# Altium PCB core.PcbDoc
Units mm, origin at the board's own origin, x right, y up, seen from the top; angles counter-clockwise.
Board outline 39.14 x 38.93 mm, 2 copper layers (Top Layer, Bottom Layer); 55 components, 63 nets, 243 pads, 505 vias.
Unrouted connection lines stored in the file: 1.
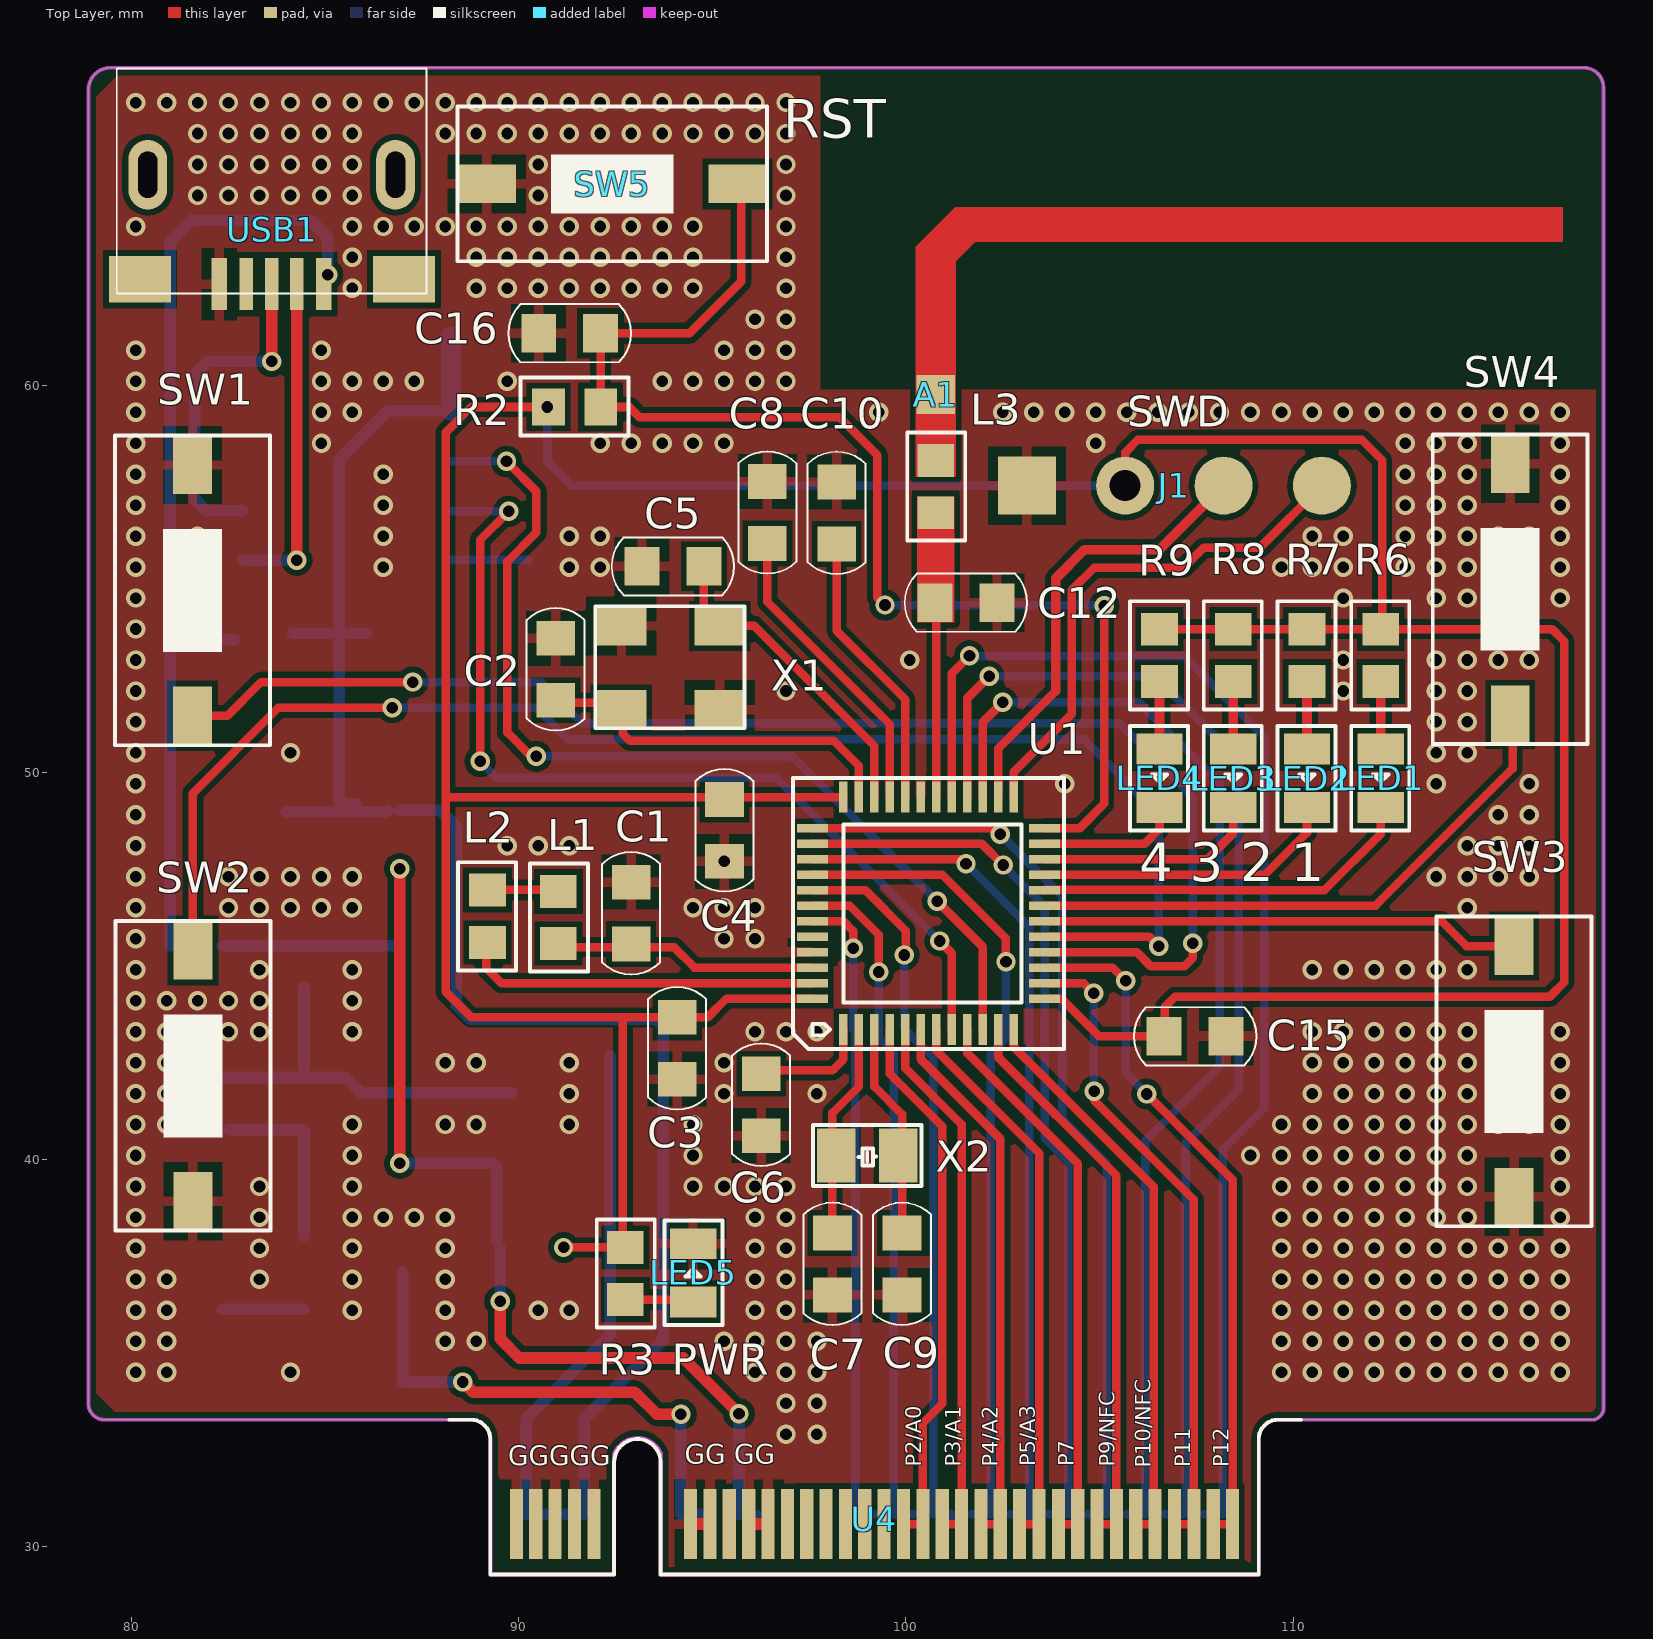
[diagram p0: Top Layer view]
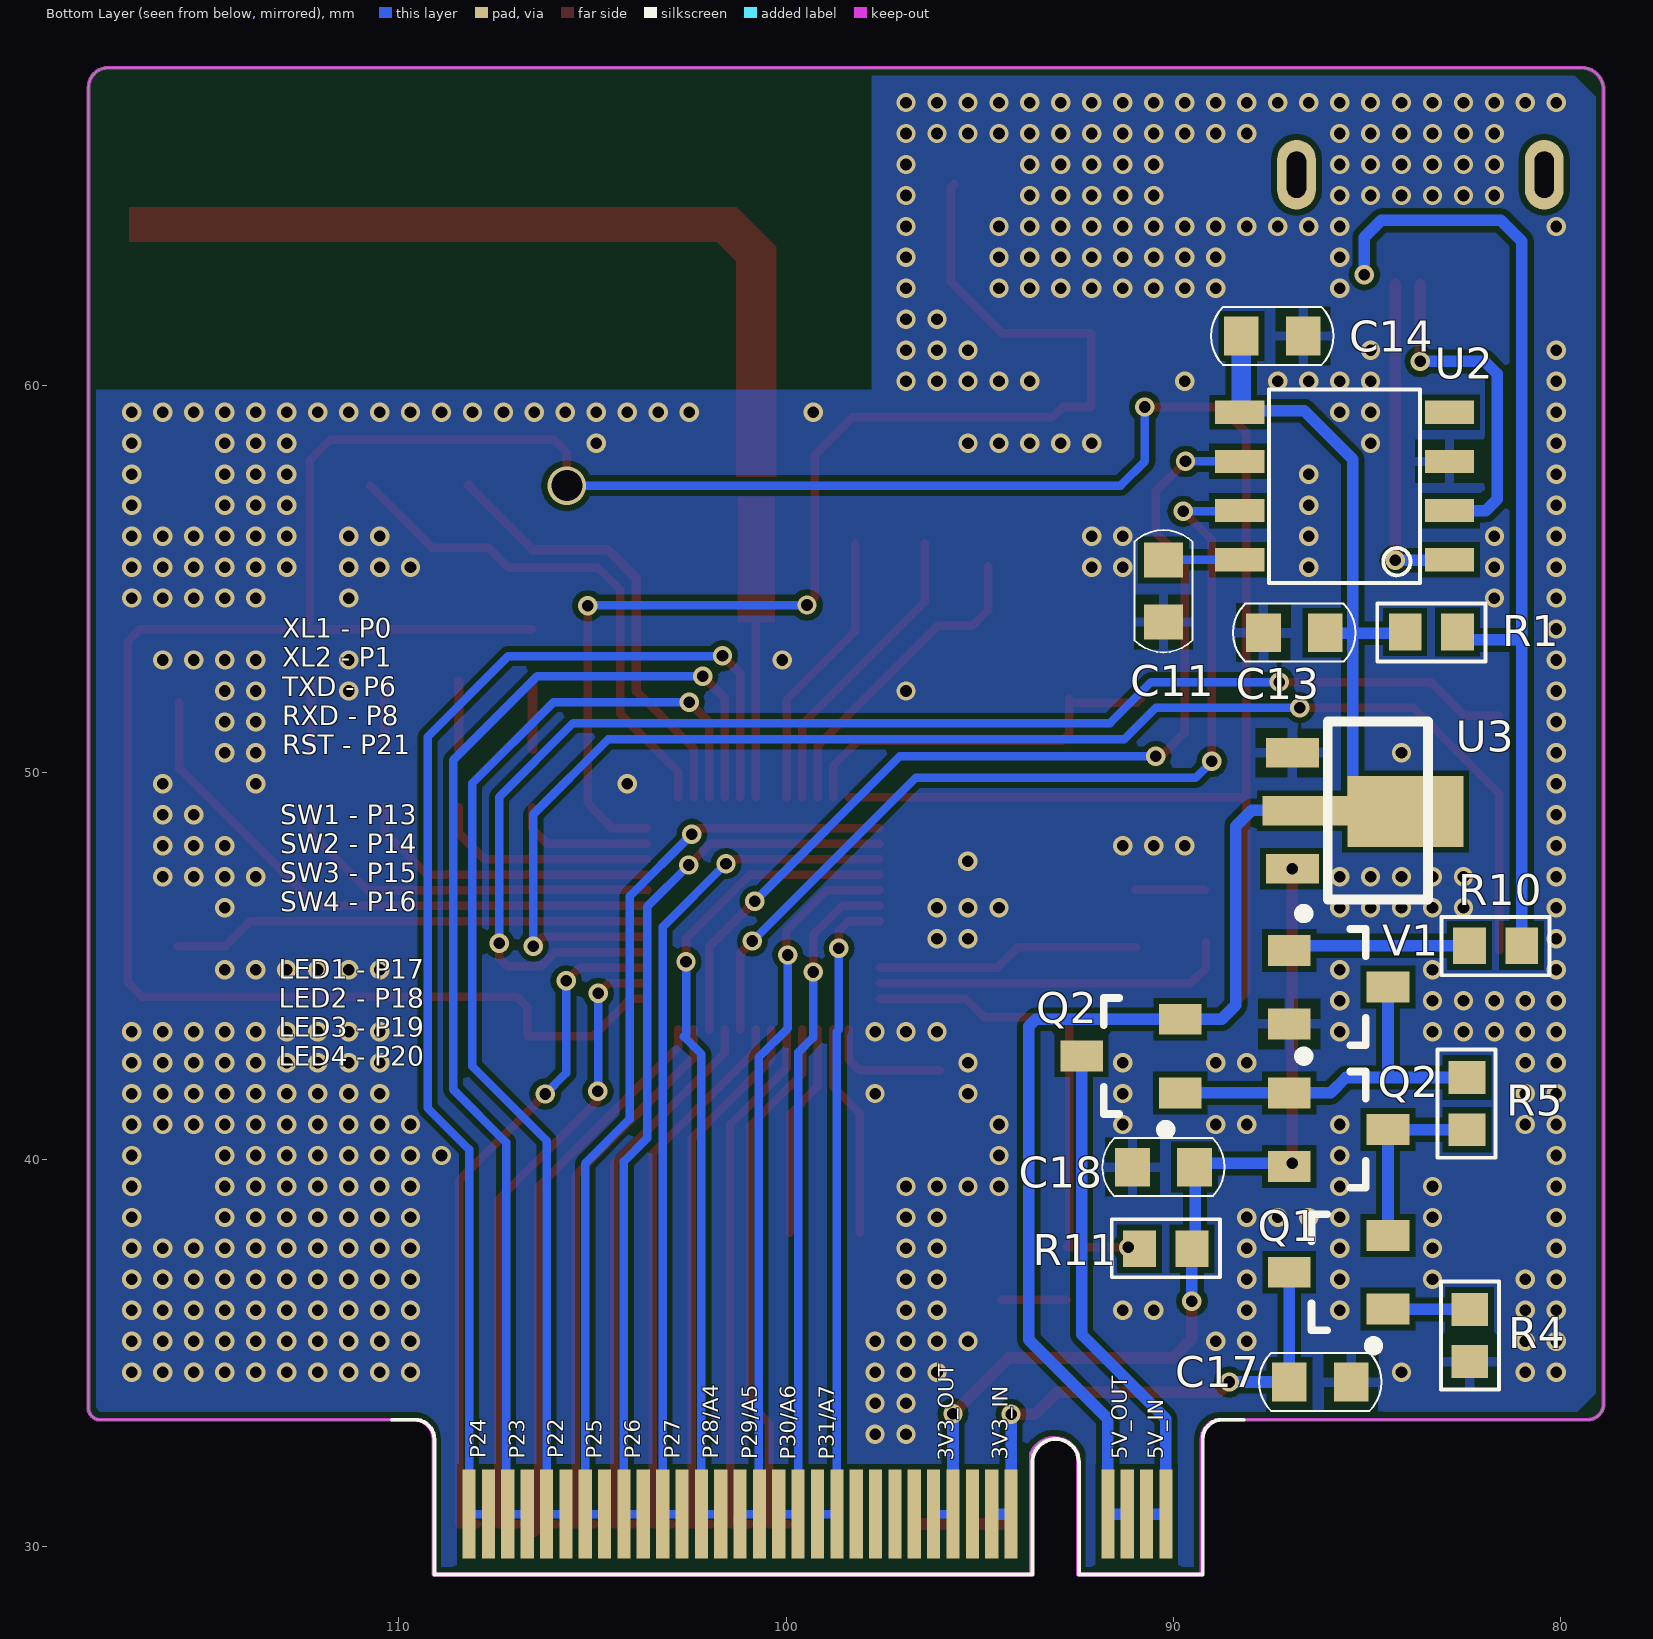
[diagram p1: Bottom Layer view, seen from below]

## Layer stack, top to bottom
Top Solder: solder mask 0.0102, Solder Resist, Dk 3.5
Top Layer: signal copper 0.0356
Dielectric 1: dielectric 0.32, FR-4, Dk 4.8
Bottom Layer: signal copper 0.0356
Bottom Solder: solder mask 0.0102, Solder Resist, Dk 3.5

## Board outline
89.263,29.274 89.263,32.774 ccw(c88.762,32.774) 88.762,33.274 79.296,33.274 cw(c79.296,33.69) 78.88,33.69 78.88,67.63 cw(c79.449,67.63) 79.449,68.199 117.511,68.199 cw(c117.511,67.69) 118.02,67.69 118.02,33.62 cw(c117.712,33.582) 117.75,33.274 109.612,33.274 ccw(c109.612,32.774) 109.112,32.774 109.112,29.275 109.113,29.274 93.67,29.274 93.67,32.41 ccw(c93.068,32.154) 92.456,32.386 92.456,29.278 92.451,29.274

## Design rules (kind name [scope] priority, off if disabled: settings)
Clearance [All] p1: gap=0.15
PlaneConnect [All] p1: planeconnectstyle=Direct reliefexpansion=0.508 reliefentries=4 reliefconductorwidth=0.254 reliefairgap=0.254
PolygonConnect PolygonConnect_1 [All vs IsVia] p1: connectstyle=Direct reliefconductorwidth=0.254 reliefentries=4 polygonreliefangle="90 Angle" airgapwidth=0.254
PolygonConnect [All] p2: connectstyle=Relief reliefconductorwidth=0.254 reliefentries=4 polygonreliefangle="90 Angle" airgapwidth=0.254
RoutingVias [All] p1: holewidth=0.711 width=1.27 viastyle="Through Hole" minholewidth=0.711 minwidth=1.27 maxholewidth=0.711 maxwidth=1.27
SolderMaskExpansion [All] p1: expansion=0.102
Width [All] p1: maxlimit=3 minlimit=0.2 preferedwidth=0.3
29 further rules are at their usual default settings.

## Components (designator, comment, footprint, x,y, rotation, side; value= is the part's Value field where it differs from the comment)
A1 "ANTENNA" AN2 100.769,59.757 r90 top
C1 "1uF" cap0603(1608) 92.9,46.36 r90 top
C2 "12pF" cap0603(1608) 90.951,52.66 r90 top
C3 "4.7uF" cap0603(1608) 94.09,42.87 r270 top
C4 "0.1uF" cap0603(1608) 95.31,48.5 r270 top
C5 "12pF" cap0603(1608) 93.98,55.32 r180 top
C6 "0.1uF" cap0603(1608) 96.26,41.411 r270 top
C7 "12pF" cap0603(1608) 98.1,37.3 r90 top
C8 "0.1uF" cap0603(1608) 96.42,56.71 r90 top
C9 "12pF" cap0603(1608) 99.9,37.3 r90 top
C10 "NC" cap0603(1608) 98.21,56.7 r90 top
C11 "0.1uF" cap0603(1608) 90.25,54.68 r270 bottom
C12 "0.8pF" cap0603(1608) 101.55,54.38 r0 top
C13 "10uF" cap0603(1608) 86.87,53.606 r0 bottom
C14 "0.47uF" cap0603(1608) 87.44,61.27 r180 bottom
C15 "0.1uF" cap0603(1608) 107.47,43.18 r0 top
C16 "1uF" cap0603(1608) 91.313,61.341 r180 top
C17 "1uF" cap0603(1608) 86.2,34.25 r180 bottom
C18 "10uF" cap0603(1608) 90.25,39.8 r0 bottom
J1 "SWD" HEAD-1x4-2.54-SMD 103.124,57.404 r0 top
L1 "15nH" 0603 91.02,46.25 r90 top
L2 "10uH" 0603 89.19,46.28 r270 top
L3 "3.9nH" 0603 100.77,57.38 r90 top
LED1 "LED" LED-0603-SMD 112.265,49.845 r270 top
LED2 "LED" LED-0603-SMD 110.36,49.845 r270 top
LED3 "LED" LED-0603-SMD 108.455,49.845 r270 top
LED4 "LED" LED-0603-SMD 106.55,49.845 r270 top
LED5 "PWR" LED-0603-SMD 94.5,37.07 r90 top
Q1 "AO3415" SOT-23-mosfet 85.725,37.084 r90 bottom
Q2 "AO3400" SOT-23-mosfet 91.09,42.67 r90 bottom
Q2 "AO3400" SOT-23-mosfet 85.725,40.767 r270 bottom
R1 "10" 0603 83.33,53.626 r180 bottom
R2 "47K" 0603 91.44,59.436 r180 top
R3 "3.3K" 0603 92.75,37.05 r90 top
R4 "47K" 0603 82.34,35.45 r90 bottom
R5 "47K" 0603 82.41,41.44 r270 bottom
R6 "220" 0603 112.265,53.02 r270 top
R7 "220" 0603 110.36,53.02 r270 top
R8 "220" 0603 108.455,53.02 r270 top
R9 "220" 0603 106.55,53.02 r270 top
R10 "47K" 0603 81.67,45.52 r180 bottom
R11 "0" 0603 90.19,37.69 r0 bottom
SW1 "SW-2P" SW_2PIN_3x6 81.57,57.937 r270 top
SW2 "SW-2P" SW_2PIN_3x6 81.58,38.92 r90 top
SW3 "SW-2P" SW_2PIN_3x6 115.71,39.033 r90 top
SW4 "SW-2P" SW_2PIN_3x6 115.61,57.967 r270 top
SW5 "RST" SW_2PIN_3x6 95.65,65.2 r180 top
U1 "N52832" N52832-QFN48 100.584,46.355 r90 top locked
U2 "CH340N" CH340N 87.52,54.89 r270 bottom
U3 "HT7333" HT7333-SOT-89 86.92,50.507 r270 bottom
U4 "M.2_MKEY_GF" M.2_M_KEY_GF 99.187,33.274 r0 top locked
USB1 "32010-05002-1220" "MICRO USB" 84.963,62.611 r0 top
V1 "NPN" SOT-23-NPN 85.725,44.45 r270 bottom
X1 "32MHz" X3225-4PIN 95.19,53.78 r180 top
X2 "32.768KHz" 32.768_A 99,40.1 r180 top

## Footprints (in the part's own frame and the unit in brackets; to place one, negate y for a bottom-side part, rotate by r counter-clockwise, add the part's x,y. Pads: shape width x height; smd on the part's side, far side on the other; paste and mask are expansions set on the pad)
32.768_A [mm]
  rect 1x1.4 smd mask+0.05: 1(-0.8,0) 2(0.8,0)
  silkscreen extent -1.4,-0.79 1.4,0.79, body extent -1.1,-0.67 1.1,0.68, height 0.7
0603 [mm]
  rect 0.85x0.95 smd: 1(-0.675,0) 2(0.675,0)
  silkscreen extent -1.4,-0.76 1.4,0.74, body extent -0.85,-0.45 0.85,0.45, height 0.89
AN2 [mm]
  rect 1x1 smd: 1(0,0)
  Top Layer region: -0.534,0.523 -0.534,-0.523 3.819,-0.523 3.819,0.523
  Top Layer region: 3.937,-16.202 4.842,-16.202 4.842,-0.501 3.937,-0.501
  Top Layer region: 3.109,-0.188 4.132,-1.211 4.842,-0.501 3.819,0.522
cap0603(1608) [mm] "Chip capcitance, Body 1.6x0.8mm, IPC Medium Density"
  rect 0.9x1 smd: 1(-0.8,0) 2(0.8,0)
  silkscreen extent -1.58,-0.75 1.58,0.75, body extent -0.85,-0.47 0.85,0.47, height 0.6
CH340N [mm]
  rect 0.6x1.27 smd: 1(-0.6,4.66) 2(-1.87,4.66) 3(-3.14,4.66) 4(-4.41,4.66) 5(-4.41,-0.76) 6(-3.14,-0.76) 7(-1.87,-0.76) 8(-0.6,-0.76)
  silkscreen extent -5,0 0,3.9
HEAD-1x4-2.54-SMD [mm]
  rect 1.5x1.5 smd: 1(0,0)
  round 1.5 smd: 2(2.54,0) 3(5.08,0) 4(7.62,0)
HT7333-SOT-89 [mil]
  rect 30x54 smd: 1(0,0) 3(118,0)
  rect 30x86.61 smd: 2(59,12.76)
  rect 72x118.11 smd: 2(60,115)
  silkscreen extent -31,36 150,138
LED-0603-SMD [mm]
  rect 0.8x1.2 smd: 1(-0.75,0) 2(0.75,0)
  silkscreen extent -1.35,-0.76 1.35,0.74, body extent -0.85,-0.45 0.85,0.45, height 0.89
M.2_M_KEY_GF [mm]
  rect 0.34x1.8 smd: 1(9.25,-2.694) 3(8.75,-2.694) 5(8.25,-2.694) 7(7.75,-2.694) 9(7.25,-2.694) 11(6.75,-2.694) 13(6.25,-2.694) 15(5.75,-2.694) 17(5.25,-2.694) 19(4.75,-2.694) 21(4.25,-2.694) 23(3.75,-2.694) 25(3.25,-2.694) 27(2.75,-2.694) 29(2.25,-2.694) 31(1.75,-2.694) 33(1.25,-2.694) 35(0.75,-2.694) 37(0.25,-2.694) 39(-0.25,-2.694) 41(-0.75,-2.694) 43(-1.25,-2.694) 45(-1.75,-2.694) 47(-2.25,-2.694) 49(-2.75,-2.694) 51(-3.25,-2.694) 53(-3.75,-2.694) 55(-4.25,-2.694) 57(-4.75,-2.694) 67(-7.25,-2.694) 69(-7.75,-2.694) 71(-8.25,-2.694) 73(-8.75,-2.694) 75(-9.25,-2.694)
  rect 0.34x2.3 smd far side: 2(9,-2.44) 4(8.5,-2.44) 6(8,-2.44) 8(7.5,-2.44) 10(7,-2.44) 12(6.5,-2.44) 14(6,-2.44) 16(5.5,-2.44) 18(5,-2.44) 20(4.5,-2.44) 22(4,-2.44) 24(3.5,-2.44) 26(3,-2.44) 28(2.5,-2.44) 30(2,-2.44) 32(1.5,-2.44) 34(1,-2.44) 36(0.5,-2.44) 38(0,-2.44) 40(-0.5,-2.44) 42(-1,-2.44) 44(-1.5,-2.44) 46(-2,-2.44) 48(-2.5,-2.44) 50(-3,-2.44) 52(-3.5,-2.44) 54(-4,-2.44) 56(-4.5,-2.44) 58(-5,-2.44) 68(-7.5,-2.44) 70(-8,-2.44) 72(-8.5,-2.44) 74(-9,-2.44)
  silkscreen extent -10.98,-4 11.02,0
"MICRO USB" [mm]
  rect 0.4x1.35 smd: 1(0,0) 5(-2.7,0)
  rect 0.35x1.35 smd: 2(-0.7,0) 3(-1.35,0) 4(-2,0)
  oval 1x1.8 hole 0.5 slot 1.2 at 90 deg: 6(1.85,2.827) 7(-4.55,2.827)
  rect 1.6x1.2 smd: 6(2.07,0.127) 7(-4.749,0.127)
  silkscreen extent -5.35,-0.25 2.65,5.56, body extent 1.4,20.01 1.4,20.01
N52832-QFN48 [mm]
  rect 0.8x0.22 smd: 1(-3,2.2) 2(-3,1.8) 3(-3,1.4) 4(-3,1) 5(-3,0.6) 6(-3,0.2) 7(-3,-0.2) 8(-3,-0.6) 9(-3,-1) 10(-3,-1.4) 11(-3,-1.8) 12(-3,-2.2) 25(3,-2.2) 26(3,-1.8) 27(3,-1.4) 28(3,-1) 29(3,-0.6) 30(3,-0.2) 31(3,0.2) 32(3,0.6) 33(3,1) 34(3,1.4) 35(3,1.8) 36(3,2.2)
  rect 0.22x0.8 smd: 13(-2.2,-3) 14(-1.8,-3) 15(-1.4,-3) 16(-1,-3) 17(-0.6,-3) 18(-0.2,-3) 19(0.2,-3) 20(0.6,-3) 21(1,-3) 22(1.4,-3) 23(1.8,-3) 24(2.2,-3) 37(2.2,3) 38(1.8,3) 39(1.4,3) 40(1,3) 41(0.6,3) 42(0.2,3) 43(-0.2,3) 44(-0.6,3) 45(-1,3) 46(-1.4,3) 47(-1.8,3) 48(-2.2,3)
  silkscreen extent -3.5,-3.5 3.5,3.5
SOT-23-mosfet [mm] "SOT-23, 3-Leads, Body 3,0x2,6mm (max), Pitch 0,95mm, IPC Medium Density"
  rect 0.8x1.1 smd: D(0,1.275) G(-0.95,-1.275) S(0.95,-1.275)
  silkscreen extent -2.03,-1.02 1.5,0.7, body extent -1.45,-1.21 1.45,1.21, height 0.98
SOT-23-NPN [mm]
  rect 0.8x1.1 smd: B(-0.95,-1.275) C(0,1.275) E(0.95,-1.275)
  silkscreen extent -2.03,-1.03 1.5,0.7, body extent -1.45,-1.21 1.45,1.21, height 0.98
SW_2PIN_3x6 [mm]
  rect 1.5x1 smd: 1(0,0) 2(6.477,0)
  silkscreen extent -0.76,-2 7.24,2
X3225-4PIN [mm]
  rect 1.3x1 smd: 1(0,0) 2(2.54,0) 3(2.54,2.159) 4(0,2.159)
  silkscreen extent -0.64,-0.51 3.21,2.64

## Part data
A1: "PCB Antenna"
C1 C2 C3 C4 C5 C6 C7 C8 C9 C10 C11 C12 C13 C14 C15 C16 C17 C18: library part CAP
J1: library part HEAD-1x4
L1 L2 L3: library part L
LED5: library part LED
Q1: library part MOSFET-P
Q2 Q2: library part MOSFET-N
SW5: library part SW-2P
U1: library part NRF52832
U4: library part M.2_MKEY_GF(gold_finger)
USB1: library part Micro_USB, "Micro_USB_5S_B"
X1: library part Crystal_4PIN
X2: library part Crystal_2PIN

## Via types
v1: diameter 0.5, hole 0.3, Top Layer to Bottom Layer, tented both sides, 497 vias
v2: diameter 0.5, hole 0.3, Top Layer to Bottom Layer, 7 vias
v3: diameter 1, hole 0.8, Top Layer to Bottom Layer, 1 vias

## Nets (pads, with @x,y where several pads share a name; then routed paths per layer and width w, separated by ;. In a path a pad name is that pad's centre, name@x,y a point inside that pad or via, vN(x,y) a via of type N, cw(c..) or ccw(c..) an arc to the next point about the centre after c; other vN are vias at no path point)
3V3_IN: C17.1 Q1.D U4.56 U4.58 | length 13.4
  Top Layer w0.3: v2(88.553,34.25) 88.819,33.984 92.996,33.984 93.567,33.413 v2(94.187,33.413)
  Bottom Layer w0.3: Q1.D C17.1 v2(88.553,34.25) ; v2(94.187,33.413) U4.58 U4.56
5V_IN: Q2.D@92.365,42.67 U4.72 U4.74 | length 13.2
  Bottom Layer w0.3: U4.72 U4.74 90.187,33.297 92.365,35.475 Q2.D@92.365,42.67
GND: C1.2 C2.2 C3.2 C4.2 C5.2 C6.2 C7.1 C8.2 C9.1 C10.2 C11.2 C12.2 C13.2 C14.2 C15.2 C16.2 C17.2 C18.2 J1.1 LED5.2 R4.1 SW1.1 SW2.1 SW3.1 SW4.1 SW5.2 U1.31 U1.45 U2.3 U3.1 U4.49 U4.51 U4.55 U4.57 U4.67 U4.69 U4.71 U4.73 U4.75 USB1.5 V1.E X1.2 X1.4 | length 1
  Top Layer w0.3: U4.57 U4.55 ; U4.51 U4.49
  other v1: 96.9,32.9 97.7,32.9 96.9,33.7 97.7,33.7 80.1,34.5 80.9,34.5 84.1,34.5 96.1,34.5 96.9,34.5 97.7,34.5 109.7,34.5 110.5,34.5 111.3,34.5 112.1,34.5 112.9,34.5 113.7,34.5 114.5,34.5 115.3,34.5 116.1,34.5 116.9,34.5 80.1,35.3 80.9,35.3 88.1,35.3 88.9,35.3 95.3,35.3 96.1,35.3 96.9,35.3 97.7,35.3 109.7,35.3 110.5,35.3 111.3,35.3 112.1,35.3 112.9,35.3 113.7,35.3 114.5,35.3 115.3,35.3 116.1,35.3 116.9,35.3 80.1,36.1 80.9,36.1 85.7,36.1 88.1,36.1 90.5,36.1 91.3,36.1 96.1,36.1 96.9,36.1 109.7,36.1 110.5,36.1 111.3,36.1 112.1,36.1 112.9,36.1 113.7,36.1 114.5,36.1 115.3,36.1 116.1,36.1 116.9,36.1 80.1,36.9 80.9,36.9 83.3,36.9 85.7,36.9 88.1,36.9 96.1,36.9 96.9,36.9 109.7,36.9 110.5,36.9 111.3,36.9 112.1,36.9 112.9,36.9 113.7,36.9 114.5,36.9 115.3,36.9 116.1,36.9 116.9,36.9 80.1,37.7 83.3,37.7 85.7,37.7 88.1,37.7 96.1,37.7 96.9,37.7 109.7,37.7 110.5,37.7 111.3,37.7 112.1,37.7 112.9,37.7 113.7,37.7 114.5,37.7 115.3,37.7 116.1,37.7 116.9,37.7 80.1,38.5 83.3,38.5 85.7,38.5 86.5,38.5 87.3,38.5 88.1,38.5 96.1,38.5 96.9,38.5 109.7,38.5 110.5,38.5 111.3,38.5 112.1,38.5 112.9,38.5 113.7,38.5 114.5,38.5 116.9,38.5 80.1,39.3 83.3,39.3 85.7,39.3 94.5,39.3 95.3,39.3 96.1,39.3 96.9,39.3 109.7,39.3 110.5,39.3 111.3,39.3 112.1,39.3 112.9,39.3 113.7,39.3 114.5,39.3 116.9,39.3 80.1,40.1 85.7,40.1 94.5,40.1 108.9,40.1 109.7,40.1 110.5,40.1 111.3,40.1 112.1,40.1 112.9,40.1 113.7,40.1 114.5,40.1 116.9,40.1 80.1,40.9 80.9,40.9 85.7,40.9 88.1,40.9 88.9,40.9 91.3,40.9 94.5,40.9 109.7,40.9 110.5,40.9 111.3,40.9 112.1,40.9 112.9,40.9 113.7,40.9 114.5,40.9 115.3,40.9 116.1,40.9 116.9,40.9 80.1,41.7 80.9,41.7 91.3,41.7 95.3,41.7 97.7,41.7 110.5,41.7 111.3,41.7 112.1,41.7 112.9,41.7 113.7,41.7 114.5,41.7 115.3,41.7 116.1,41.7 116.9,41.7 80.1,42.5 80.9,42.5 88.1,42.5 88.9,42.5 91.3,42.5 95.3,42.5 110.5,42.5 111.3,42.5 112.1,42.5 112.9,42.5 113.7,42.5 114.5,42.5 115.3,42.5 116.1,42.5 116.9,42.5 80.1,43.3 80.9,43.3 81.7,43.3 82.5,43.3 83.3,43.3 85.7,43.3 96.1,43.3 96.9,43.3 97.7,43.3 110.5,43.3 111.3,43.3 112.1,43.3 112.9,43.3 113.7,43.3 114.5,43.3 115.3,43.3 116.1,43.3 116.9,43.3 80.1,44.1 80.9,44.1 81.7,44.1 82.5,44.1 83.3,44.1 85.7,44.1 80.1,44.9 83.3,44.9 85.7,44.9 110.5,44.9 111.3,44.9 112.1,44.9 112.9,44.9 113.7,44.9 114.5,44.9 80.1,45.7 95.3,45.7 96.1,45.7 80.1,46.5 82.5,46.5 83.3,46.5 84.1,46.5 84.9,46.5 85.7,46.5 94.5,46.5 95.3,46.5 96.1,46.5 114.5,46.5 80.1,47.3 82.5,47.3 83.3,47.3 84.1,47.3 84.9,47.3 85.7,47.3 113.7,47.3 114.5,47.3 115.3,47.3 116.1,47.3 95.31,47.7 80.1,48.1 89.7,48.1 90.5,48.1 91.3,48.1 114.5,48.1 115.3,48.1 116.1,48.1 80.1,48.9 115.3,48.9 116.1,48.9 80.1,49.7 104.1,49.7 113.7,49.7 116.1,49.7 80.1,50.5 84.1,50.5 113.7,50.5 114.5,50.5 80.1,51.3 113.7,51.3 114.5,51.3 80.1,52.1 96.9,52.1 111.3,52.1 113.7,52.1 114.5,52.1 80.1,52.9 100.1,52.9 111.3,52.9 113.7,52.9 114.5,52.9 115.3,52.9 116.1,52.9 80.1,53.7 80.1,54.5 81.7,54.5 111.3,54.5 113.7,54.5 114.5,54.5 115.3,54.5 116.1,54.5 116.9,54.5 80.1,55.3 81.7,55.3 86.5,55.3 91.3,55.3 92.1,55.3 109.7,55.3 110.5,55.3 111.3,55.3 112.9,55.3 113.7,55.3 114.5,55.3 115.3,55.3 116.1,55.3 116.9,55.3 80.1,56.1 81.7,56.1 86.5,56.1 91.3,56.1 92.1,56.1 110.5,56.1 111.3,56.1 112.9,56.1 113.7,56.1 114.5,56.1 115.3,56.1 116.1,56.1 116.9,56.1 80.1,56.9 86.5,56.9 112.9,56.9 113.7,56.9 114.5,56.9 116.9,56.9 80.1,57.7 86.5,57.7 112.9,57.7 113.7,57.7 114.5,57.7 116.9,57.7 80.1,58.5 84.9,58.5 92.1,58.5 92.9,58.5 93.7,58.5 94.5,58.5 95.3,58.5 104.9,58.5 112.9,58.5 113.7,58.5 114.5,58.5 116.9,58.5 80.1,59.3 84.9,59.3 85.7,59.3 99.3,59.3 102.5,59.3 103.3,59.3 104.1,59.3 104.9,59.3 105.7,59.3 106.5,59.3 107.3,59.3 108.1,59.3 108.9,59.3 109.7,59.3 110.5,59.3 111.3,59.3 112.1,59.3 112.9,59.3 113.7,59.3 114.5,59.3 115.3,59.3 116.1,59.3 116.9,59.3 80.1,60.1 84.9,60.1 85.7,60.1 86.5,60.1 87.3,60.1 89.7,60.1 93.7,60.1 94.5,60.1 95.3,60.1 96.1,60.1 96.9,60.1 80.1,60.9 84.9,60.9 95.3,60.9 96.1,60.9 96.9,60.9 96.1,61.7 96.9,61.7 85.7,62.5 88.9,62.5 89.7,62.5 90.5,62.5 91.3,62.5 92.1,62.5 92.9,62.5 93.7,62.5 94.5,62.5 96.9,62.5 85.7,63.3 88.9,63.3 89.7,63.3 90.5,63.3 91.3,63.3 92.1,63.3 92.9,63.3 93.7,63.3 94.5,63.3 96.9,63.3 80.1,64.1 85.7,64.1 86.5,64.1 87.3,64.1 88.1,64.1 88.9,64.1 89.7,64.1 90.5,64.1 91.3,64.1 92.1,64.1 92.9,64.1 93.7,64.1 94.5,64.1 96.9,64.1 81.7,64.9 82.5,64.9 83.3,64.9 84.1,64.9 84.9,64.9 85.7,64.9 90.5,64.9 91.3,64.9 92.1,64.9 92.9,64.9 93.7,64.9 96.9,64.9 81.7,65.7 82.5,65.7 83.3,65.7 84.1,65.7 84.9,65.7 85.7,65.7 90.5,65.7 91.3,65.7 92.1,65.7 92.9,65.7 93.7,65.7 96.9,65.7 81.7,66.5 82.5,66.5 83.3,66.5 84.1,66.5 84.9,66.5 85.7,66.5 88.1,66.5 88.9,66.5 89.7,66.5 90.5,66.5 91.3,66.5 92.1,66.5 92.9,66.5 93.7,66.5 94.5,66.5 95.3,66.5 96.1,66.5 96.9,66.5 80.1,67.3 80.9,67.3 81.7,67.3 82.5,67.3 83.3,67.3 84.1,67.3 84.9,67.3 85.7,67.3 86.5,67.3 87.3,67.3 88.1,67.3 88.9,67.3 89.7,67.3 90.5,67.3 91.3,67.3 92.1,67.3 92.9,67.3 93.7,67.3 94.5,67.3 95.3,67.3 96.1,67.3 96.9,67.3
NetA1_1: A1.1 L3.2
NetC1_1: C1.1 L1.1 U1.46 | length 6.9
  Top Layer w0.22: L1.1@90.95,45.48 94.01,45.48 94.535,44.955 U1.46
NetC2_1: C2.1 U1.35 X1.3 | length 9.9
  Top Layer w0.22: C2.1@90.84,51.905 90.944,51.801 X1.3@92.52,51.801 ; X1.3@92.68,51.896 92.68,51.001 92.871,50.81 98.14,50.81 98.784,50.166 U1.35
NetC5_1: C5.1 U1.34 X1.1 | length 8.3
  Top Layer w0.22: C5.1 94.78,54.19 X1.1 96.08,53.78 99.184,50.676 U1.34
NetC6_1: C6.1 U1.1 | length 3.3
  Top Layer w0.22: C6.1@96.02,42.3 98.1,42.3 98.384,42.584 U1.1
NetC7_2: C7.2 U1.2 X2.2 | length 5.5
  Top Layer w0.22: C7.2 98.1,41.2 98.784,41.884 U1.2
NetC8_1: C8.1 U1.33 | length 7.9
  Top Layer w0.22: C8.1 96.42,54.4 99.584,51.236 U1.33
NetC9_2: C9.2 U1.3 X2.1 | length 5.6
  Top Layer w0.22: U1.3 99.184,41.879 99.9,41.163 C9.2
NetC10_1: C10.1 U1.32 | length 7.3
  Top Layer w0.22: C10.1 98.21,53.65 99.984,51.876 U1.32
NetC11_1: C11.1 U2.8 | length 2
  Bottom Layer w0.22: U2.8 90.24,55.49 C11.1
NetC12_1: C12.1 L3.1 U1.30 | length 5
  Top Layer w0.22: U1.30 C12.1@100.784,54.34
NetL1_2: L1.2 L2.1 | length 1.8
  Top Layer w0.22: L2.1@89.19,46.964 L1.2@90.981,46.964
NetL2_2: L2.2 U1.47 | length 9.3
  Top Layer w0.22: L2.2@89.154,45.614 89.154,44.946 89.545,44.555 U1.47
NetLED1_1: LED1.1 R6.2 | length 1.7
  Top Layer w0.254: LED1.1 R6.2
NetLED2_1: LED2.1 R7.2 | length 1.7
  Top Layer w0.254: LED2.1 R7.2
NetLED3_1: LED3.1 R8.2 | length 1.7
  Top Layer w0.254: LED3.1 R8.2
NetLED4_1: LED4.1 R9.2 | length 1.7
  Top Layer w0.254: LED4.1 R9.2
NetLED5_1: LED5.1 R3.1 | length 1.7
  Top Layer w0.22: R3.1 LED5.1@94.445,36.375
NetQ1_G: Q1.G R4.2 | length 2.1
  Bottom Layer w0.3: R4.2 Q1.G@84.441,36.125
NetQ1_S: Q1.S Q2.D@84.45,40.767 R5.2 | length 4.7
  Bottom Layer w0.3: R5.2@82.508,40.767 84.45,40.767 Q1.S
NetQ2_G: Q2.G R5.1 V1.C | length 9.9
  Bottom Layer w0.3: R5.1 85.535,42.115 85.933,41.717 87,41.717 Q2.G@89.812,41.717 ; 84.45,42.125 V1.C
NetR10_1: R10.1 V1.B | length 4.5
  Bottom Layer w0.3: R10.1 V1.B@86.88,45.52
P0.02/AIN0: U1.4 U4.33 U4.35 | length 14
  Top Layer w0.22: U1.4 99.584,42.206 100.94,40.85 100.94,33.69 100.437,33.187 U4.33 U4.35
P0.03/AIN1: U1.5 U4.29 U4.31 | length 13.9
  Top Layer w0.22: U1.5 99.984,42.356 101.437,40.903 U4.29 U4.31
P0.04/AIN2: U1.6 U4.25 U4.27 | length 14.2
  Top Layer w0.22: U1.6 100.384,42.586 102.437,40.533 102.437,30.64 102.497,30.58 U4.25 U4.27
P0.05/AIN3: U1.7 U4.21 U4.23 | length 14.4
  Top Layer w0.22: U1.7 100.784,42.816 103.437,40.163 U4.21 U4.23
P0.06: U1.8 U2.7 | length 24.4
  Top Layer w0.22: v1(89,50.28) 89,56.001 v2(89.739,56.74) ; v1(100.87,45.64) 101.184,45.326 U1.8
  Bottom Layer w0.22: U2.7 88.3,56.74 v2(89.739,56.74) ; v1(89,50.28) 89.425,49.855 96.655,49.855 v1(100.87,45.64)
P0.07: U1.9 U4.17 U4.19 | length 14.5
  Top Layer w0.22: U1.9 101.584,42.746 104.437,39.893 U4.17 U4.19
P0.08: U1.10 U2.6 | length 25.7
  Top Layer w0.22: v2(89.68,58.03) 90.45,57.26 90.45,56.19 89.706,55.446 89.706,51.024 90.319,50.411 v1(90.45,50.411) ; v1(100.807,46.67) 101.984,45.493 U1.10
  Bottom Layer w0.22: U2.6 v2(89.68,58.03) ; v1(90.45,50.411) 97.066,50.411 v1(100.807,46.67)
P0.09/NFC1: U1.11 U4.13 U4.15 | length 14.6
  Top Layer w0.22: U1.11 102.384,42.636 105.437,39.583 105.437,30.64 105.497,30.58 U4.13 U4.15
P0.10/NFC2: U1.12 U4.9 U4.11 | length 14.9
  Top Layer w0.22: U1.12 102.784,42.906 106.403,39.287 U4.9@106.403,30.58 ; U4.11 U4.9@106.403,30.58 ; U4.9@106.403,30.444 U4.9@106.497,30.35 ; U4.9 U4.9@106.403,30.58
P0.11: U1.14 U4.5 U4.7 | length 16.7
  Top Layer w0.22: U1.14 104.59,44.555 v1(104.855,44.29) ; v1(104.862,41.76) 104.862,41.528 107.437,38.953 U4.5 U4.7
  Bottom Layer w0.22: v1@104.855,41.76 v1(104.855,44.29)
P0.12: U1.15 U4.1 U4.3 | length 17.9
  Top Layer w0.22: U1.15 105.335,44.955 v1(105.68,44.61) ; v1(106.22,41.69) 108.437,39.473 U4.1 U4.3@107.971,30.58
  Bottom Layer w0.22: v1(105.68,44.61) 105.68,42.23 v1(106.22,41.69)
P0.13: SW1.2 U1.16 | length 35.7
  Top Layer w0.22: SW1.2 82.47,51.46 83.34,52.33 v1(87.26,52.33) ; U1.16 105.96,45.355 106.325,44.99 107.197,44.99 107.41,45.203 v1(107.41,45.58)
  Bottom Layer w0.22: v1(87.26,52.33) 90.57,52.33 91.63,51.27 105.5,51.27 107.41,49.36 v1(107.41,45.58)
P0.14: SW2.2 U1.17 | length 37.5
  Top Layer w0.22: SW2.2 81.58,49.46 83.79,51.67 v1(86.73,51.67) ; U1.17 106.285,45.755 v1(106.53,45.51)
  Bottom Layer w0.22: v1(86.73,51.67) 90.447,51.67 91.267,50.85 104.597,50.85 106.53,48.917 v1(106.53,45.51)
P0.15: SW3.2 U1.18 | length 12.4
  Top Layer w0.22: U1.18 113.835,46.155 114.48,45.51 SW3.2
P0.16: SW4.2 U1.19 | length 15.3
  Top Layer w0.22: U1.19 112.13,46.555 115.67,50.095 SW4.2@115.67,51.813
P0.17: LED1.2 U1.20 | length 10
  Top Layer w0.22: U1.20 103.589,46.96 107.35,46.96 107.355,46.955 110.815,46.955 112.265,48.405 LED1.2
P0.18: LED2.2 U1.21 | length 7.9
  Top Layer w0.22: U1.21 109.275,47.355 110.36,48.44 LED2.2
P0.19: LED3.2 U1.22 | length 5.8
  Top Layer w0.22: U1.22 107.786,47.755 108.455,48.424 LED3.2
P0.20: LED4.2 U1.23 | length 3.7
  Top Layer w0.22: U1.23 106.17,48.155 106.55,48.535 LED4.2
P0.21/RST: C16.1 R2.1 SW5.1 U1.24 | length 32.8
  Top Layer w0.22: SW5.1 95.74,65.11 95.74,62.67 94.411,61.341 C16.1 92.115,61.339 R2.1 92.854,59.436 93.12,59.17 98.285,59.17 99.26,58.195 99.26,54.52 v1(99.46,54.32) ; U1.24 104.49,48.555 105.12,49.185 v1(105.12,54.3)
  Bottom Layer w0.22: v1(99.46,54.32) 105.1,54.32 v1(105.12,54.3)
P0.22: U1.27 U4.10 U4.12 | length 29.3
  Top Layer w0.22: U1.27 101.984,51.294 v1(102.5,51.81)
  Bottom Layer w0.22: v1(102.5,51.81) 106.01,51.81 108.11,49.71 108.11,42.41 106.187,40.487 U4.10 U4.12
P0.23: U1.28 U4.6 U4.8 | length 31.3
  Top Layer w0.22: U1.28 101.584,51.914 v1(102.15,52.48)
  Bottom Layer w0.22: v1(102.15,52.48) 106.43,52.48 108.6,50.31 108.6,41.81 107.23,40.44 107.23,30.877 U4.6 U4.8
P0.24: U1.29 U4.2 U4.4 | length 33.4
  Top Layer w0.22: U1.29 101.184,52.554 v1(101.64,53.01)
  Bottom Layer w0.22: v1@101.64,53 107.175,53 109.26,50.915 109.26,41.33 108.187,40.257 U4.2 U4.4
P0.25: U1.37 U4.14 U4.16 | length 24.1
  Top Layer w0.22: U1.37 102.279,48.555 v1(102.434,48.4)
  Bottom Layer w0.22: v1(102.434,48.4) 104.04,46.794 104.04,41.039 105.187,39.892 U4.14 U4.16
P0.26: U1.38 U4.18 U4.20 | length 23.1
  Top Layer w0.22: U1.38 101.958,48.155 v1(102.51,47.603)
  Bottom Layer w0.22: v1(102.51,47.603) 103.584,46.529 103.584,40.548 104.187,39.945 U4.18 U4.20
P0.27: U1.39 U4.22 U4.24 | length 22.2
  Top Layer w0.22: U1.39 101.435,47.755 v1(101.55,47.64)
  Bottom Layer w0.22: v1(101.55,47.64) 103.187,46.003 U4.22 ; U4.24 U4.22 ; U4.22@103.187,30.64 U4.22
P0.28/AIN4: U1.40 U4.26 U4.28 | length 21.3
  Top Layer w0.22: U1.40 100.935,47.355 102.584,45.706 v1(102.584,45.106)
  Bottom Layer w0.22: U4.28 U4.26 102.187,42.72 102.64,43.173 102.584,43.229 v1(102.584,45.106)
P0.29/AIN5: U1.41 U4.30 U4.32 | length 19.3
  Top Layer w0.22: U1.41 98.947,46.955 99.991,45.911 99.991,45.316 v1(99.955,45.28)
  Bottom Layer w0.22: v1(99.955,45.28) 99.955,43.384 100.71,42.629 U4.32@100.71,30.834 ; U4.32 U4.32@100.71,30.834 ; U4.32@100.71,30.834 U4.30 U4.30@101.2,30.821 ; U4.30@101.2,30.821 101.2,30.627 101.247,30.58 101.247,30.774 U4.30@101.2,30.821
P0.30/AIN6: U1.42 U4.34 U4.36 | length 17.7
  Top Layer w0.22: U1.42 98.545,46.555 99.3,45.8 v1(99.3,44.84)
  Bottom Layer w0.22: v1(99.3,44.84) 99.3,43.147 99.68,42.767 U4.36@99.68,30.834 ; U4.36 U4.34
P0.31/AIN7: U1.43 U4.38 U4.40 | length 16.6
  Top Layer w0.22: U1.43 98.38,46.155 98.634,45.901 v1(98.634,45.454)
  Bottom Layer w0.22: v1(98.634,45.454) 98.634,43.355 98.687,43.302 U4.40 ; U4.40@98.8,30.834 U4.38
SWDCLK: J1.4 U1.25 | length 13.5
  Top Layer w0.22: U1.25 102.784,50.004 104.28,51.5 104.28,54.7 104.86,55.28 107.167,55.28 107.687,55.8 109.14,55.8 J1.4
SWDIO: J1.3 U1.26 | length 11.6
  Top Layer w0.22: U1.26 102.384,50.614 103.87,52.1
  Top Layer w0.254: 103.87,52.1 103.87,55.01 104.61,55.75 106.55,55.75 J1.3
USB_D+: U2.2 USB1.3 | length 8.7
  Top Layer w0.3: v1(83.613,60.613) USB1.3
  Bottom Layer w0.3: U2.2 81.92,56.76 81.63,57.05 81.63,60.29 81.953,60.613 v1(83.613,60.613)
USB_D-: U2.1 USB1.2 | length 8.5
  Top Layer w0.3: v1(84.263,55.477) USB1.2
  Bottom Layer w0.3: U2.1 82.863,55.493 82.879,55.477 v1(84.263,55.477)
USB_VBUS: R1.2 R10.2 USB1.1 | length 25.3
  Bottom Layer w0.3: R10.2 80.995,63.715 81.54,64.26 84.62,64.26 85.06,63.82 v1(85.06,62.85) ; 81.025,53.42 R1.2@82.655,53.42
VDD_3V3: C18.1 Q2.S@87,39.817 R11.1 U3.3 U4.50 U4.52 | length 24.5
  Top Layer w0.3: v1(86.92,39.897) v1(86.92,47.51) ; v2(89.515,36.335) 89.515,35.365 90.01,34.87 94.247,34.87 v2(95.687,33.43)
  Bottom Layer w0.22: U4.52 U4.50
  Bottom Layer w0.3: v1(86.92,39.897) 89.353,39.897 89.433,39.817 R11.1@89.433,37.912 ; v2(89.515,36.335) R11.1 ; U4.52 v2(95.687,33.43)
VDD_5V: C13.1 C14.1 Q2.S@89.815,43.62 R1.1 U2.5 U3.2 U4.68 U4.70 | length 45
  Bottom Layer w0.3: U3.2@83.999,48.983 86.571,48.983 U3.2@86.596,49.009 ; R1.1@84.157,53.59 C13.1@86.07,53.59 ; U3.2@85.78,49.19 85.36,49.19 85.36,58.09 86.61,59.34 U2.5@88.24,59.34 ; U3.2@86.917,49.02 87.97,49.02 88.38,48.61 88.38,43.98 88.74,43.62 89.815,43.62 93.55,43.62 93.73,43.44 93.73,35.34 91.687,33.297 U4.68 U4.70
  Bottom Layer w0.5: U2.5@88.24,59.34 C14.1
VDD_NRF: C3.1 C4.1 C15.1 J1.2 R2.2 R3.2 R6.1 R7.1 R8.1 R9.1 R11.2 U1.13 U1.36 U1.48 | length 108
  Top Layer w0.22: R2.2 88.766,59.436 88.11,58.78 88.11,49.355 ; v1(91.155,37.725) R3.2 92.69,37.785 92.69,43.67 ; U1.48 95.365,44.155 94.88,43.67 C3.1 92.69,43.67 ; U1.36 88.11,49.355 ; U1.13 104.01,44.155 104.985,43.18 C15.1@106.621,43.18 ; v3(105.664,57.404) 105.664,58.264 105.994,58.594 111.77,58.594 112.3,58.064 R6.1@112.3,53.91 ; R9.1 R8.1 R7.1 R6.1 116.695,53.695 117.01,53.38 117.01,44.58 116.63,44.2 106.951,44.2 106.687,43.936 106.687,43.35 106.67,43.333 C15.1 ; 88.11,49.355 88.11,44.33 88.77,43.67 92.69,43.67
  Bottom Layer w0.22: v2(90.73,59.436) 90.73,58.034 91.36,57.404 v3(105.664,57.404) ; v1(91.155,37.725) R11.2@91.19,37.69
pads on no net: U1.44 U2.4 U4.37 U4.39 U4.41 U4.42 U4.43 U4.44 U4.45 U4.46 U4.47 U4.48 U4.53 U4.54 USB1.4 USB1.6 USB1.7

## Polygon pours and split planes (outlines as drawn)
GND on Bottom Layer "GND_L02_P010" (solid, pour order 10): 78.88,33.59 79.196,33.274 88.763,33.274 89.263,32.773 89.263,29.274 92.446,29.278 92.456,32.4 92.763,32.774 93.37,32.766 93.665,32.4 93.665,29.28 109.111,29.274 109.112,32.774 109.612,33.274 117.824,33.274 118.02,33.47 118.02,67.82 117.641,68.199 117.617,68.175 79.515,68.175 78.88,67.54
GND on Top Layer "GND_L01_P008" (solid, pour order 8): 117.641,68.199 118.02,67.82 118.02,33.47 117.824,33.274 109.612,33.274 109.112,32.774 109.112,29.275 93.725,29.275 93.68,32.36 93.33,32.766 92.862,32.766 92.456,32.36 92.451,29.283 89.262,29.274 89.262,32.773 88.763,33.274 79.196,33.274 78.88,33.59 78.88,67.54 79.515,68.175 79.613,68.175

## Keep-outs
Keep-Out Layer:
  lines w0.1: 92.451,29.274 89.263,29.274 89.263,32.774 ccw(c88.762,32.774) 88.762,33.274 79.296,33.274 cw(c79.296,33.69) 78.88,33.69 78.88,67.63 cw(c79.449,67.63) 79.449,68.199 117.511,68.199 cw(c117.511,67.69) 118.02,67.69 118.02,33.62 cw(c117.712,33.582) 117.75,33.274 109.612,33.274 ccw(c109.612,32.774) 109.112,32.774 109.112,29.275 109.113,29.274 93.67,29.274 93.67,32.41 ccw(c93.068,32.154) 92.456,32.386 92.456,29.278

## Other copper
Top Layer:
  rectangle net NetA1_1: 100.25,57.63 101.29,59.92
  rectangle net NetC12_1: 100.29,53.866 101.25,57.13
  pour cut-out: 97.79,68.199 117.89,68.235 117.89,63.8 117.89,59.88 98.362,59.88 97.79,59.88 97.79,60.452
Bottom Layer:
  pour cut-out: 117.641,68.199 97.79,68.199 97.79,59.88 117.89,59.88 118.02,60.01 118.02,67.82

## Silkscreen, mask and mechanical layers (free items; w line width, h text height)
Top Overlay:
  text "4 3 2 1" at 106.025,47.19 h1
  text "GG GG" at 94.29,32.14 h0.5
  text "GGGGG" at 89.724,32.096 h0.5
  text "P5/A3" at 103.34,32.07 h0.4 r90
  text "P7" at 104.34,32.07 h0.4 r90
  text "P2/A0" at 100.393,32.06 h0.4 r90
  text "P3/A1" at 101.41,32.06 h0.4 r90
  text "P4/A2" at 102.37,32.06 h0.4 r90
  text "P9/NFC" at 105.4,32.06 h0.4 r90
  text "P11" at 107.34,32.05 h0.4 r90
  text "P12" at 108.34,32.05 h0.4 r90
  text "P10/NFC" at 106.33,32.04 h0.4 r90
Bottom Overlay:
  text "XL1 - P0 / XL2 - P1 / TXD - P6 / RXD - P8 / RST - P21" at 113.015,50.47 h0.5
  text "SW1 - P13 / SW2 - P14 / SW3 - P15 / SW4 - P16" at 113.06,46.41 h0.5
  text "LED1 - P17 / LED2 - P18 / LED3 - P19 / LED4 - P20" at 113.1,42.42 h0.5
  text "P22" at 105.757,32.28 h0.4 r270
  text "P24" at 107.76,32.28 h0.4 r270
  text "5V_IN" at 90.26,32.25 h0.4 r270
  text "5V_OUT" at 91.187,32.25 h0.4 r270
  text "P29/A5" at 100.75,32.25 h0.4 r270
  text "P28/A4" at 101.75,32.26 h0.4 r270
  text "P27" at 102.75,32.26 h0.4 r270
  text "P26" at 103.76,32.27 h0.4 r270
  text "P25" at 104.766,32.27 h0.4 r270
  text "P23" at 106.744,32.27 h0.4 r270
  text "3V3_IN" at 94.271,32.24 h0.4 r270
  text "3V3_OUT" at 95.666,32.22 h0.4 r270
  text "P31/A7" at 98.76,32.24 h0.4 r270
  text "P30/A6" at 99.75,32.24 h0.4 r270